# EAGLE board Reaktionstester_BRD (EAGLE 9.5.0)
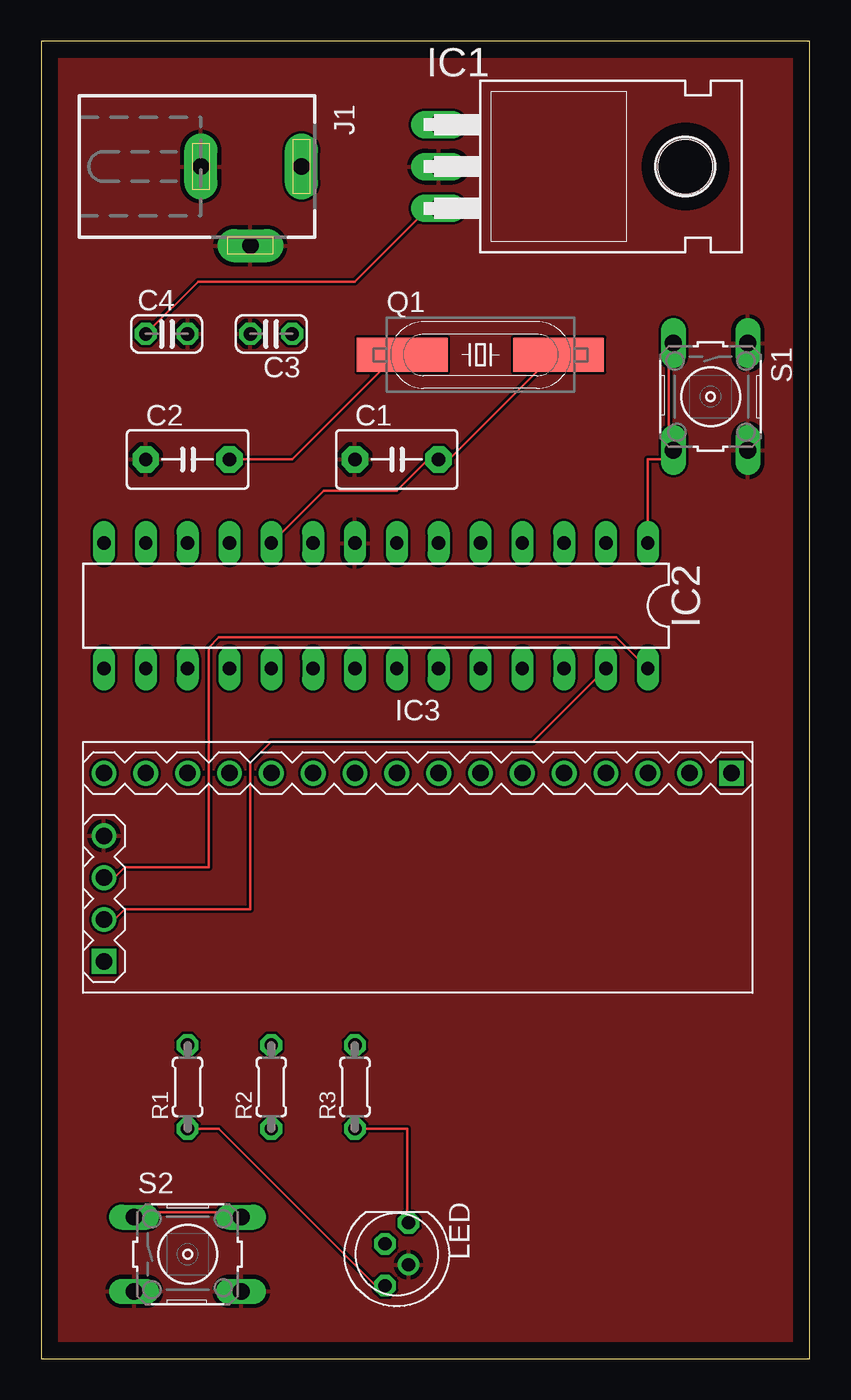
[diagram p0: board, top side]
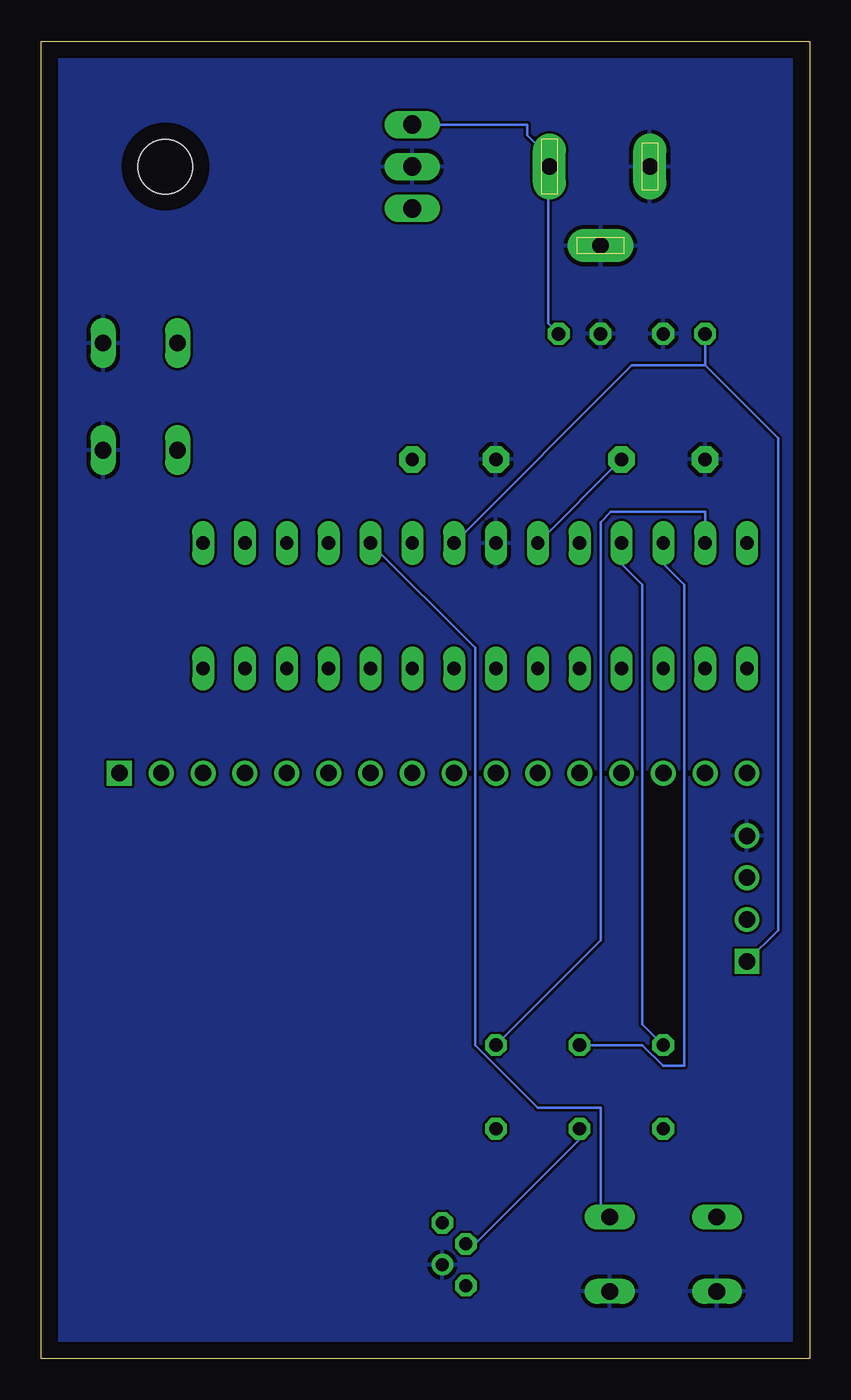
[diagram p1: board, bottom side, seen from below]

Size 46.66 x 80 mm. Coordinates in mm from the lower left corner, seen from the top.
Outline: 0,0 46.66,0 46.66,80 0,80 0,0
Copper layers (1*16): Top 0.035mm / dielectric 1.5mm / Bottom 0.035mm
Design rules "default": minimum track width 6mil, minimum drill 0.35mm, track to track 6mil, track to pad 6mil, pad to pad 6mil, via to via 6mil, smd to smd 6mil, copper to edge 40mil, drill to drill 6mil, minimum pad ring 10mil, minimum via ring 8mil, stop-mask expansion 4mil, vias tented up to drill 0mil, thermal gap 10mil

## Footprints (pad centres in the part's own frame; a part is rotated, then mirrored left to right if it is on the bottom)
C5B3.5 = drill 0.813 pad 1.6 octagon: 1 -2.54,0; 2 2.54,0
C025-024X044 = drill 0.813 octagon: 1 -1.27,0; 2 1.27,0
TO220H = drill 1.118 long: 1 -2.54,-10.16; 2 0,-10.16; 3 2.54,-10.16 | hole 3.302: 0,4.826
DIL28-3 = drill 0.813 long: 1 -16.51,-3.81; 2 -13.97,-3.81; 3 -11.43,-3.81; 4 -8.89,-3.81; 5 -6.35,-3.81; 6 -3.81,-3.81; 7 -1.27,-3.81; 8 1.27,-3.81; 9 3.81,-3.81; 10 6.35,-3.81; 11 8.89,-3.81; 12 11.43,-3.81; 13 13.97,-3.81; 14 16.51,-3.81; 15 16.51,3.81; 16 13.97,3.81; 17 11.43,3.81; 18 8.89,3.81; 19 6.35,3.81; 20 3.81,3.81; 21 1.27,3.81; 22 -1.27,3.81; 23 -3.81,3.81; 24 -6.35,3.81; 25 -8.89,3.81; 26 -11.43,3.81; 27 -13.97,3.81; 28 -16.51,3.81
LCD-I2C-CONVERTER = drill 1 square: J1.1 -19.05,-5.08; J2.1 19.05,6.35 | drill 1: J1.2 -19.05,-2.54; J1.3 -19.05,0; J1.4 -19.05,2.54; J2.2 16.51,6.35; J2.3 13.97,6.35; J2.4 11.43,6.35; J2.5 8.89,6.35; J2.6 6.35,6.35; J2.7 3.81,6.35; J2.8 1.27,6.35; J2.9 -1.27,6.35; J2.10 -3.81,6.35; J2.11 -6.35,6.35; J2.12 -8.89,6.35; J2.13 -11.43,6.35; J2.14 -13.97,6.35; J2.15 -16.51,6.35; J2.16 -19.05,6.35
DCJ0202 = drill 1 pad 2 long: 1 0,3.1; 2 4.8,0; 3 0,-3
LED5MMRGB = drill 0.8 pad 0.813 octagon: P$1 -1.905,0.714; P$2 -0.635,-0.714; P$4 1.905,-0.714 | drill 0.8 pad 0.813: P$3 0.635,0.714
11.4X4.5 = smd 5.5 x 2.08: 1 -4.75,0; 2 4.75,0
0204/5 = drill 0.813 octagon: 1 -2.54,0; 2 2.54,0
B3F-10XX = drill 1.016 long: 1 -3.251,2.261; 2 3.251,2.261; 3 -3.251,-2.261; 4 3.251,-2.261

## Placement (x,y rotation side)
C1  15p  [C5B3.5]  21.59,54.61 0 top
C2  15p  [C5B3.5]  8.89,54.61 0 top
C3  0,1µ  [C025-024X044]  13.97,62.23 180 top
C4  0,33µ  [C025-024X044]  7.62,62.23 0 top
IC1  7805T  [TO220H]  34.29,72.39 270 top
IC2  ATMEGA328-20P  [DIL28-3]  20.32,45.72 180 top
IC3  LCD-I2C-CONVERTER  [LCD-I2C-CONVERTER]  22.86,29.21 0 top
J1  DCJ0202  [DCJ0202]  12.7,72.39 270 top
LED  5MMRGBLED  [LED5MMRGB]  21.59,6.35 270 top
Q1  16Mhz  [11.4X4.5]  26.67,60.96 0 top
R1  330Ω  [0204/5]  8.89,16.51 90 top
R2  330Ω  [0204/5]  13.97,16.51 90 top
R3  330Ω  [0204/5]  19.05,16.51 90 top
S1  [B3F-10XX]  40.64,58.42 270 top
S2  [B3F-10XX]  8.89,6.35 0 top

## Library data of the parts
C1 C2 = capacitor-wima
C3 C4 = rcl; SPICEPREFIX: C
IC1 = linear
IC2 = atmega328
IC3 = diy-modules
J1 = con-jack; OC_FARNELL: unknown; OC_NEWARK: unknown
LED = led_rgb
Q1 = crystal-geyer_V1_0
R1-R3 = rcl; SPICEPREFIX: R
S1 S2 = switch-omron; MPN: B3F-1000; OC_FARNELL: 176432; OC_NEWARK: 36M3542

## Nets
+5V: C4.1 IC1.3 IC2.7 IC3.J1.1
GND: C1.1 C2.1 C3.2 C4.2 IC1.2 IC2.8 IC3.J1.4 J1.2 J1.3 LED.P$3 S1.1 S1.2 S2.3 S2.4
N$1: C1.2 IC2.10 Q1.2
N$2: LED.P$1 R3.1
N$3: C2.2 IC2.9 Q1.1
N$4: IC2.11 R1.2
N$5: IC2.5 S2.1 S2.2
N$6: IC2.12 R2.2
N$7: IC2.13 R3.2
N$8: C3.1 IC1.1 J1.1
N$9: LED.P$2 R2.1
N$10: LED.P$4 R1.1
N$11: IC2.28 IC3.J1.3
N$12: IC2.1 S1.3 S1.4
N$17: IC2.27 IC3.J1.2

## Tracks (layer width: path | path; a pad name or v marks a point on that pad's centre or on a via)
+5V
  Top 0.152: C4.1 9.53,65.41 19.05,65.41 23.5,69.85 IC1.3
  Bottom 0.152: IC2.7 10.79,60.33 6.35,60.33 | C4.1 6.35,60.33 | IC3.J1.1 1.91,26.04 1.91,55.88 6.35,60.33
GND
  pour Top: 0,80.01 0,0 46.99,0 46.99,80.01
  pour Bottom: 0,0 0,80.01 46.99,80.01 46.99,0
N$1
  Top 0.152: IC2.10 17.14,52.7 21.59,52.7 23.5,54.61 C1.2 24.77,54.61 31.11,60.96 Q1.2
N$2
  Top 0.152: R3.1 22.23,13.97 22.23,8.26 LED.P$1
N$3
  Top 0.152: C2.2 15.24,54.61 21.59,60.96 Q1.1
  Bottom 0.152: C2.2 IC2.9
N$4
  Bottom 0.152: R1.2 10.16,20.32 10.16,46.99 11.43,48.26 IC2.11
N$5
  Top 0.152: S2.1 5.71,8.89 12.06,8.89 S2.2
  Bottom 0.152: IC2.5 20.32,43.18 20.32,19.05 16.51,15.24 12.7,15.24 12.7,8.89 S2.2
N$6
  Bottom 0.152: R2.2 10.16,19.05 8.89,17.78 7.62,17.78 7.62,46.99 8.89,48.26 IC2.12
N$7
  Bottom 0.152: R3.2 12.7,25.4 12.7,50.8 12.06,51.44 6.35,51.44 IC2.13
N$8
  Bottom 0.152: C3.1 15.88,62.87 15.88,72.39 | IC1.1 17.14,74.93 17.14,74.3 15.88,73.03 15.88,72.39 | 15.88,72.39 J1.1
N$9
  Bottom 0.152: R2.1 13.97,13.34 20.32,6.99 LED.P$2
N$10
  Top 0.152: R1.1 10.79,13.97 20.32,4.45 LED.P$4
N$11
  Top 0.152: IC2.28 34.92,43.81 10.79,43.81 10.16,43.18 10.16,29.84 5.08,29.84 4.45,29.21 IC3.J1.3
N$12
  Top 0.152: IC2.1 36.83,54.61 38.1,54.61 S1.4 38.1,55.24 38.1,61.59 S1.3
N$17
  Top 0.152: IC2.27 29.84,37.47 13.97,37.47 12.7,36.2 12.7,27.3 5.08,27.3 4.45,26.67 IC3.J1.2